# Altium PCB Range_Finder.PcbDoc
Units mm, origin at the board's own origin, x right, y up, seen from the top; angles counter-clockwise.
Board outline 68 x 97 mm, 2 copper layers (Top Layer, Bottom Layer), stack 1.569 mm thick; 50 components, 62 nets, 245 pads, 12 vias.
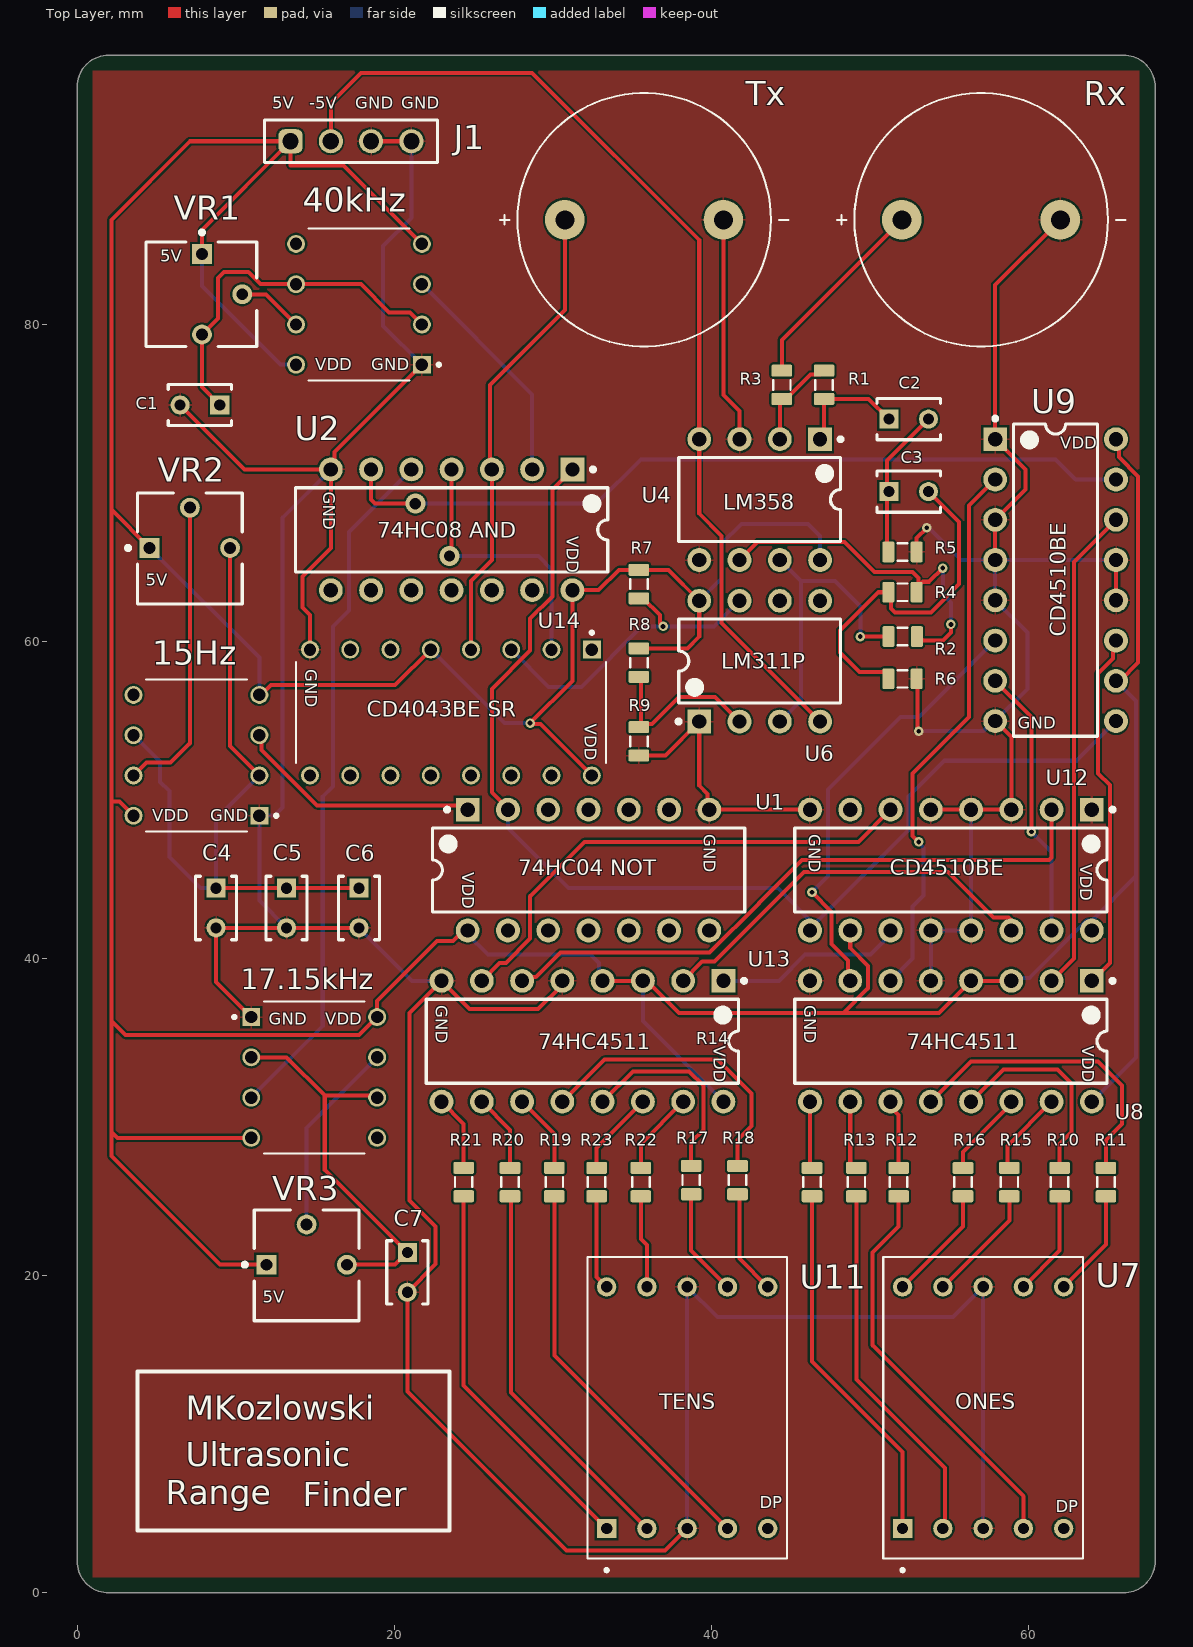
[diagram p0: Top Layer view]
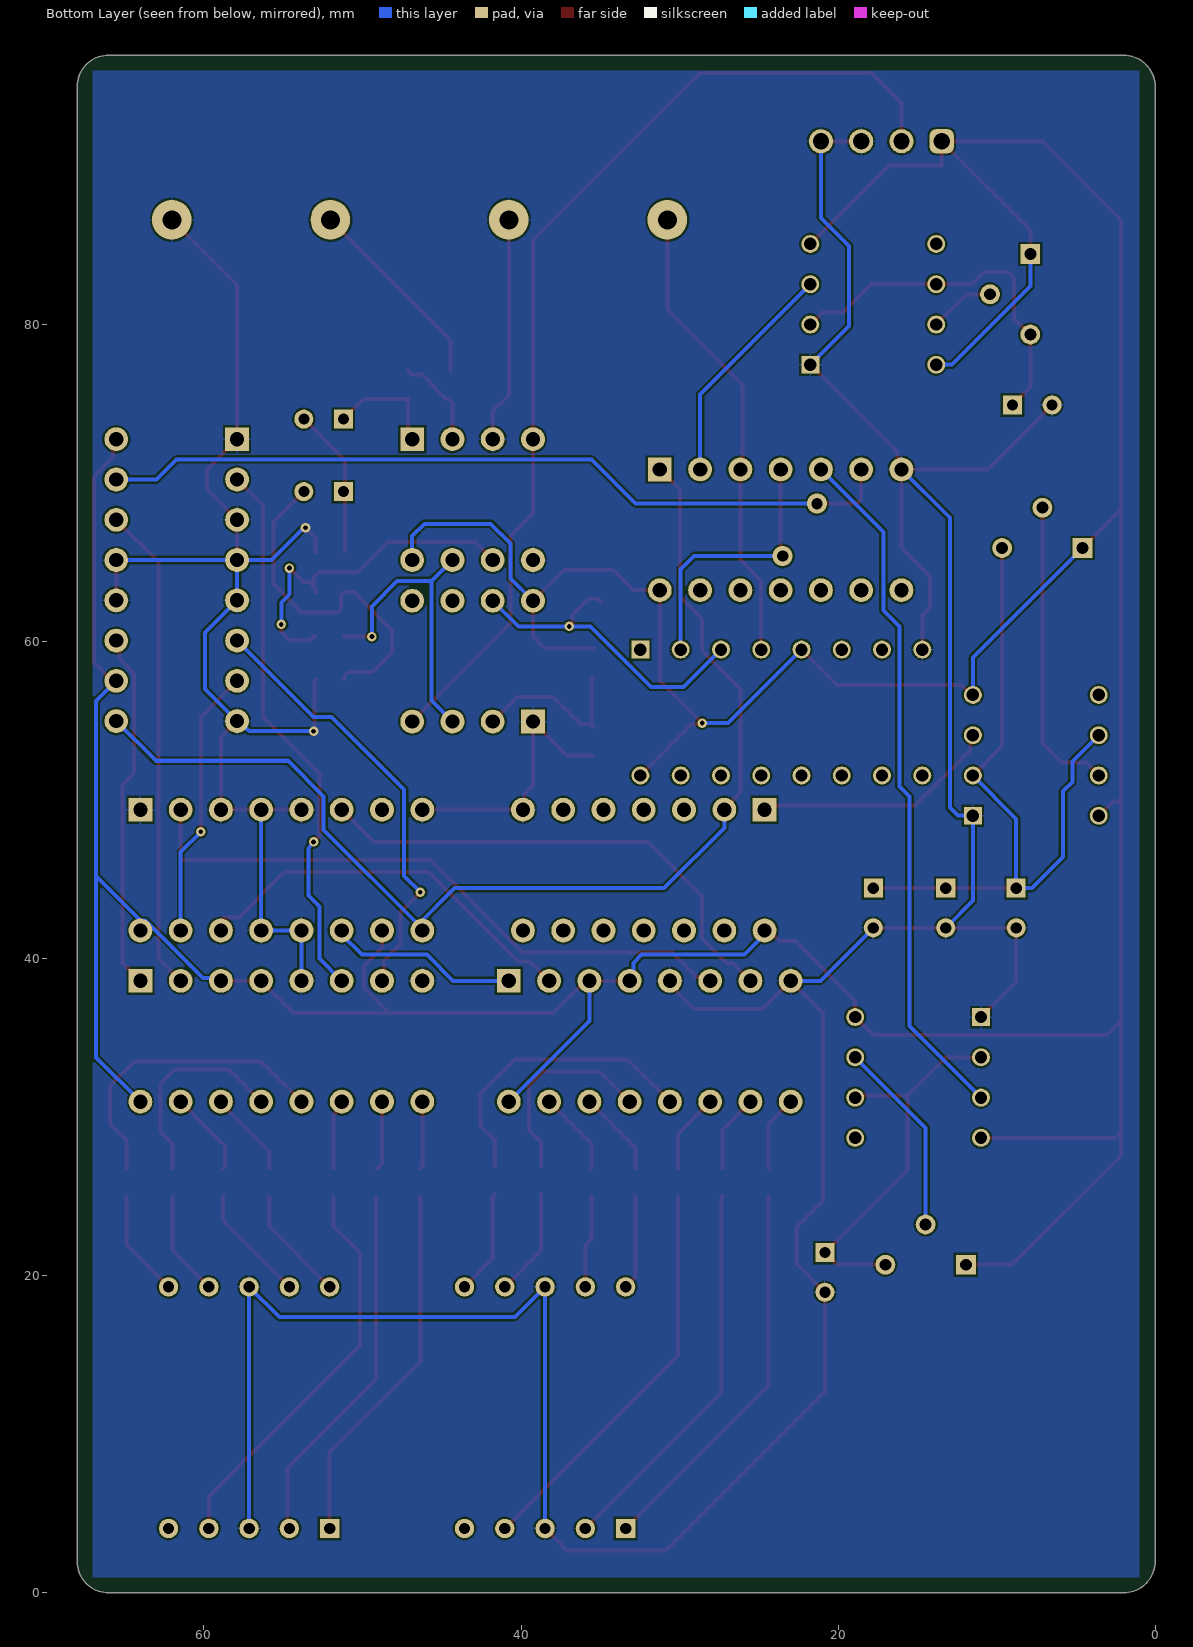
[diagram p1: Bottom Layer view, seen from below]
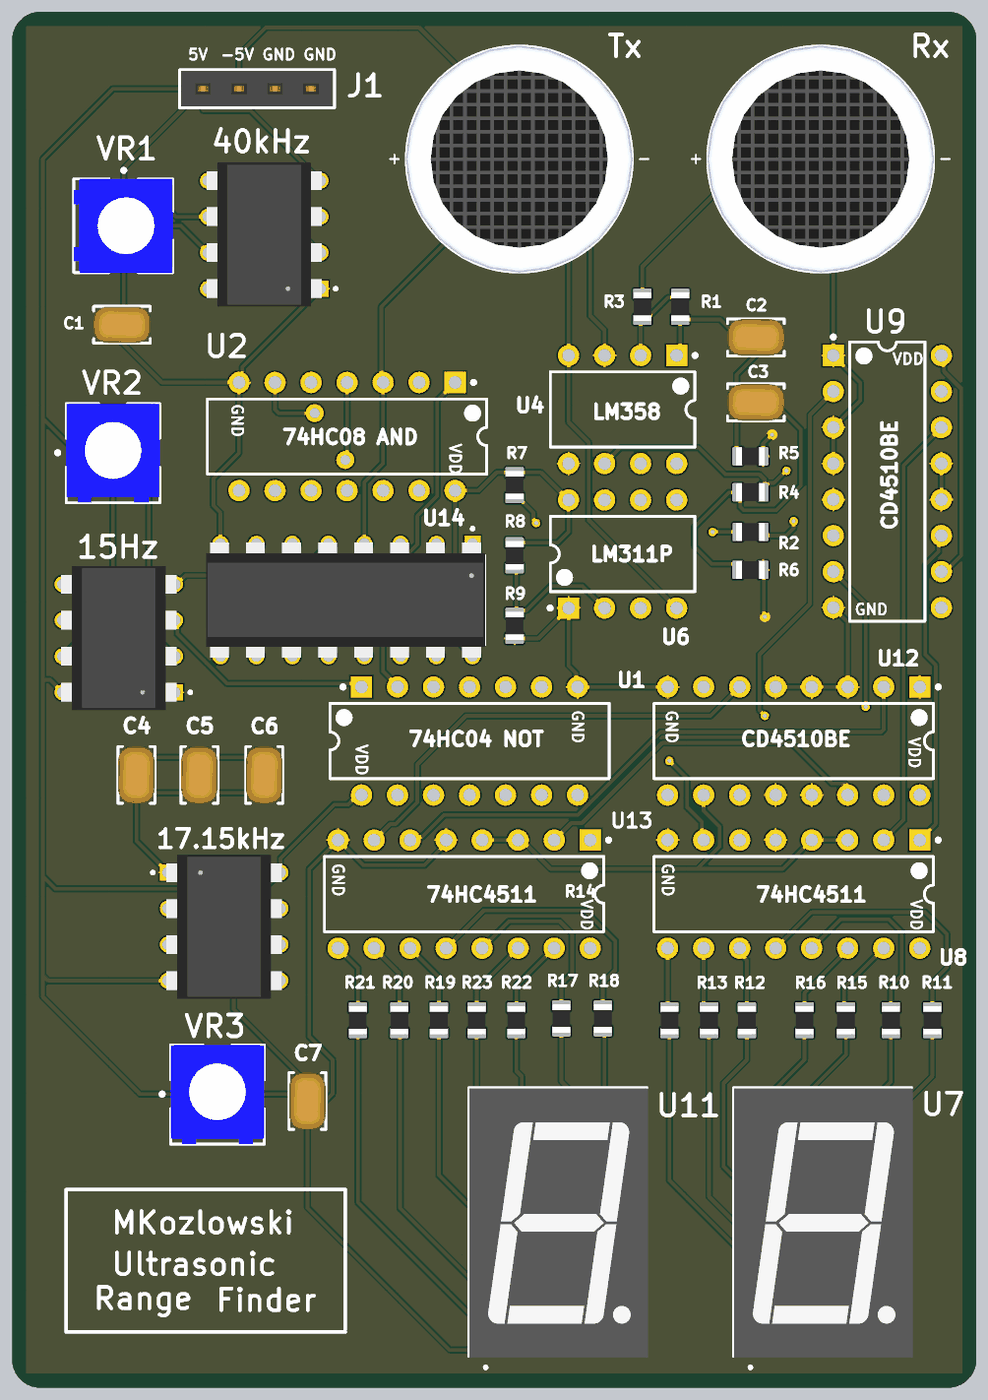
[diagram p2: 3D render of the assembled board from above, using the file's embedded part models]

## Layer stack, top to bottom
Top Solder: solder mask 0.0127, Solder Resist, Dk 3.3
Top Layer: signal copper 0.035
Dielectric 1: core 1.4986, FR-4, Dk 4.3
Bottom Layer: signal copper 0.035
Bottom Solder: solder mask 0.0127, Solder Resist, Dk 3.3

## Board outline
0,2 0,95 cw(c2,95) 2,97 66,97 cw(c66,95) 68,95 68,2 cw(c66,2) 66,0 2,0 cw(c2,2)

## Design rules (kind name [scope] priority, off if disabled: settings)
BoardOutlineClearance [All] p1: gap=0.2 ignorepadtopadclearanceinfootprint=FALSE
Clearance [All] p1: gap=0.127 ignorepadtopadclearanceinfootprint=FALSE except(0.25: Arc-Hole Track-Hole SMDPad-Hole THPad-Hole Via-Hole Fill-Hole Poly-Hole Region-Hole Text-Hole)
ComponentClearance [All] p1: gap=0.127 collisioncheckmode=3 verticalgap=0.127 showdistances=TRUE
DiffPairsRouting [All] p1: maxlimit=0.254 minlimit=0.127 mostfreqgap=0.127 toplayer_minwidth=0.127 toplayer_maxwidth=25.4 toplayer_prefwidth=0.127 bottomlayer_minwidth=0.127 bottomlayer_maxwidth=25.4 bottomlayer_prefwidth=0.127 maxuncoupledlength=12.7
Height [All] p1: minheight=0 maxheight=1816.048 prefheight=12.7
HoleSize [All] p1: absolutevalues=TRUE maxlimit=6.3 minlimit=0.3 maxpercent=80.000 minpercent=20.000
HoleToHoleClearance [All] p1: gap=0.25 allowstackedmicrovias=FALSE
MinimumAnnularRing [All] p1: minimumring=0.076
MinimumSolderMaskSliver [All] p1: minsoldermaskwidth=0
PlaneClearance [All] p1: clearance=0.127
PlaneConnect PlaneConnectPowerPads [InPadClass('PowerPads')] p1: planeconnectstyle=Direct reliefexpansion=0.508 reliefentries=4 reliefconductorwidth=0.254 reliefairgap=0.254
PlaneConnect [All] p2: pad.planeconnectstyle=Relief pad.reliefexpansion=0.3 pad.reliefentries=4 pad.reliefconductorwidth=0.127 pad.reliefairgap=0.127 via.planeconnectstyle=Direct via.reliefexpansion=0.3 via.reliefentries=4 via.reliefconductorwidth=0.127 via.reliefairgap=0.127
PolygonConnect PolygonConnectPowerPads [All vs (InPadClass('PowerPads'))] p1: connectstyle=Direct reliefconductorwidth=0.254 reliefentries=4 polygonreliefangle="90 Angle" airgapwidth=0.254
PolygonConnect [All] p2: thpad.connectstyle=Relief thpad.reliefconductorwidth=0.127 thpad.reliefentries=4 thpad.polygonreliefangle="90 Angle" thpad.airgapwidth=0.127 smdpad.connectstyle=Relief smdpad.reliefconductorwidth=0.127 smdpad.reliefentries=4 smdpad.polygonreliefangle="90 Angle" smdpad.airgapwidth=0.127 via.connectstyle=Direct via.reliefconductorwidth=0.127 via.reliefentries=4 via.polygonreliefangle="90 Angle" via.airgapwidth=0.127
RoutingVias [All] p1: holewidth=0.3 width=0.6 viastyle="Through Hole" minholewidth=0.3 minwidth=0.6 maxholewidth=0.6 maxwidth=6.6
SilkToSilkClearance [All] p1: silktosilkclearance=0
SilkToSolderMaskClearance [IsPad] p1: minsilkscreentomaskgap=0.127 clearancetoexposedcopper=TRUE
SolderMaskExpansion [All] p1: expansion=0.075 istentingtop=FALSE
Width [All] p1: maxlimit=25.4 minlimit=0.127 preferedwidth=0.127 minimp=50.000000 maximp=50.000000 favimp=50.000000
20 further rules are at their usual default settings.

## Classes and differential pairs
component class TOF_Pulse: 15Hz 40kHz C1 C2 C3 C4 C5 C6 J1 R1 R2 R3 R4 R5 R6 R7 R8 R9 Rx Tx U1 U2 U4 U6 U14 VR1 VR2
component class Display: 17.15kHz C7 R10 R11 R12 R13 R14 R15 R16 R17 R18 R19 R20 R21 R22 R23 U7 U9 U11 U12 U13 VR3

## Components (designator, comment, footprint, x,y, rotation, side; value= is the part's Value field where it differs from the comment)
15Hz "TLC555CP" DIP794W45P254L959H508Q8 7.526,52.832 r180 top (schematic designator U5)
17.15kHz "TLC555CP" DIP794W45P254L959H508Q8 14.953,32.512 r0 top (schematic designator U10)
40kHz "TLC555CP" DIP794W45P254L959H508Q8 17.78,81.28 r180 top (schematic designator U3)
C1 "3n3" FP-K221K15X7RF5TL2-MFG 7.747,74.93 r180 top
C2 "520p" FP-K221K15X7RF5TL2-MFG 52.451,74.041 r0 top
C3 "520p" FP-K221K15X7RF5TL2-MFG 52.451,69.469 r0 top
C4 "743n" FP-K221K15X7RF5TL2-MFG 8.763,43.2 r270 top
C5 "45n" FP-K221K15X7RF5TL2-MFG 13.208,43.2 r270 top
C6 "102n" FP-K221K15X7RF5TL2-MFG 17.78,43.2 r270 top
C7 "8n9" FP-K221K15X7RF5TL2-MFG 20.828,20.213 r270 top
J1 "61300411821" 61300411821 17.272,91.567 r0 top
R1 "1KR5J" RESC0805(2012)_L 47.117,76.2 r270 top value=110k
R2 "1KR5J" RESC0805(2012)_L 52.07,60.325 r180 top value=150k
R3 "1KR5J" RESC0805(2012)_L 44.45,76.2 r270 top value=10k
R4 "1KR5J" RESC0805(2012)_L 52.069,63.119 r0 top value=10k
R5 "1KR5J" RESC0805(2012)_L 52.069,65.659 r0 top value=12k
R6 "1KR5J" RESC0805(2012)_L 52.07,57.658 r0 top value=12k
R7 "1KR5J" RESC0805(2012)_L 35.433,63.627 r270 top value=20k
R8 "1KR5J" RESC0805(2012)_L 35.433,58.674 r270 top value=90k
R9 "1KR5J" RESC0805(2012)_L 35.433,53.71 r270 top value=10k
R10 "1KR5J" RESC0805(2012)_L 61.976,25.908 r270 top value=330R
R11 "1KR5J" RESC0805(2012)_L 64.897,25.908 r270 top value=330R
R12 "1KR5J" RESC0805(2012)_L 51.816,25.908 r270 top value=330R
R13 "1KR5J" RESC0805(2012)_L 49.149,25.908 r270 top value=330R
R14 "1KR5J" RESC0805(2012)_L 46.355,25.908 r270 top value=330R
R15 "1KR5J" RESC0805(2012)_L 58.801,25.908 r270 top value=330R
R16 "1KR5J" RESC0805(2012)_L 55.88,25.908 r270 top value=330R
R17 "1KR5J" RESC0805(2012)_L 38.735,26.035 r270 top value=330R
R18 "1KR5J" RESC0805(2012)_L 41.656,26.035 r270 top value=330R
R19 "1KR5J" RESC0805(2012)_L 30.099,25.909 r270 top value=330R
R20 "1KR5J" RESC0805(2012)_L 27.305,25.909 r270 top value=330R
R21 "1KR5J" RESC0805(2012)_L 24.384,25.909 r270 top value=330R
R22 "1KR5J" RESC0805(2012)_L 35.56,25.908 r270 top value=330R
R23 "1KR5J" RESC0805(2012)_L 32.766,25.909 r270 top value=330R
Rx "Rx" XDCR_CUSA-T80-12-2600-TH 57.023,86.614 r0 top value=0 (schematic designator A2)
Tx "Tx" XDCR_CUSA-T80-12-2600-TH 35.767,86.614 r0 top value=0 (schematic designator A1)
U1 "SN74HC04N" N0014A#1 32.258,45.593 r270 top
U2 "SN74HC08N" N0014A#2 23.622,67.056 r270 top
U4 "LM358P" P0008A 43.053,68.961 r270 top
U6 "LM311P" P0008A 43.053,58.772 r90 top
U7 "LDSC512RI" LED_LDSC512RI 57.15,11.684 r90 top
U8 "CD74HC4511E" N0016A 55.118,34.798 r270 top
U9 "CD4510BE" N0016A 61.722,63.881 r0 top
U11 "LDSC512RI" LED_LDSC512RI 38.481,11.684 r90 top
U12 "CD4510BE" N0016A 55.118,45.593 r270 top
U13 "CD74HC4511E" N0016A 31.877,34.798 r270 top
U14 "CD4043BE" DIP794W45P254L1969H508Q16 23.577,55.532 r270 top
VR1 "3362P-1-103LF" BOUR-3362P 7.839,81.915 r270 top
VR2 "3362P-1-103LF" BOUR-3362P 7.112,65.878 r0 top
VR3 "3362P-1-103LF" BOUR-3362P 14.478,20.666 r0 top

## Footprints (in the part's own frame and the unit in brackets; to place one, negate y for a bottom-side part, rotate by r counter-clockwise, add the part's x,y. Pads: shape width x height; smd on the part's side, far side on the other; paste and mask are expansions set on the pad)
61300411821 [mm] "Socket Header, Pitch 2.54 mm, THT, Vertical, single row, 4p"
  rrect50% 1.52x1.52 hole 1.02: 1(-3.81,0)
  round 1.52 hole 1.02: 2(-1.27,0) 3(1.27,0) 4(3.81,0)
  silkscreen extent -5.46,-1.35 5.46,1.35, body extent -5.33,-1.25 5.33,1.25, height 8.55
BOUR-3362P [mm] "THD, 3-Leads, Body 6.6x6.99mm, Pitch 2.54mm"
  rect 1.25x1.25 hole 0.75: 1(-2.54,0.035)
  round 1.25 hole 0.75: 2(0,2.575) 3(2.54,0.035)
  silkscreen extent -4.02,-3.49 3.3,3.5, body extent -3.3,-3.49 3.3,3.5, height 4.5
DIP794W45P254L959H508Q8 [mm]
  rect 1.13x1.13 hole 0.78: 1(-3.97,3.81)
  round 1.13 hole 0.78: 2(-3.97,1.27) 3(-3.97,-1.27) 4(-3.97,-3.81) 5(3.97,-3.81) 6(3.97,-1.27) 7(3.97,1.27) 8(3.97,3.81)
  silkscreen extent -5.13,-4.79 3.18,4.79, body extent -4.06,-5.09 4.06,5.07, height 5.21
DIP794W45P254L1969H508Q16 [mm]
  rect 1.13x1.13 hole 0.78: 1(-3.97,8.89)
  round 1.13 hole 0.78: 2(-3.97,6.35) 3(-3.97,3.81) 4(-3.97,1.27) 5(-3.97,-1.27) 6(-3.97,-3.81) 7(-3.97,-6.35) 8(-3.97,-8.89) 9(3.97,-8.89) 10(3.97,-6.35) 11(3.97,-3.81) 12(3.97,-1.27) 13(3.97,1.27) 14(3.97,3.81) 15(3.97,6.35) 16(3.97,8.89)
  silkscreen extent -5.13,-9.77 3.18,9.77, body extent -4.06,-9.9 4.06,9.78, height 5.21
FP-K221K15X7RF5TL2-MFG [mm]
  rect 1.2x1.2 hole 0.7 paste-1000 mask+0: 1(-1.25,0)
  round 1.2 hole 0.7 paste-1000 mask+0: 2(1.25,0)
  silkscreen extent -2,-1.3 2,1.3, body extent -2.1,-1.4 2.1,1.4, height 0.25
LED_LDSC512RI [mm]
  rect 1.218x1.218 / inner round 1.218 / far side rect 1.218x1.218 hole 0.71: 1(-7.62,5.08)
  round 1.218 hole 0.71: 2(-7.62,2.54) 3(-7.62,0) 4(-7.62,-2.54) 5(-7.62,-5.08) 6(7.62,-5.08) 7(7.62,-2.54) 8(7.62,0) 9(7.62,2.54) 10(7.62,5.08)
  silkscreen extent -10.35,-6.3 9.5,6.3, body extent -9.56,-6.36 9.44,6.24, height 8
N0014A#1 [mm] "DIP, 14-Leads, Body 19.7x6.6mm, Pitch 2.54mm"
  rect 1.5x1.5 hole 0.9: 1(-3.81,-7.62)
  round 1.5 hole 0.9: 2(-3.81,-5.08) 3(-3.81,-2.54) 4(-3.81,0) 5(-3.81,2.54) 6(-3.81,5.08) 7(-3.81,7.62) 8(3.81,7.62) 9(3.81,5.08) 10(3.81,2.54) 11(3.81,0) 12(3.81,-2.54) 13(3.81,-5.08) 14(3.81,-7.62)
  silkscreen extent -3.93,-9.85 2.65,9.85, body extent -3.95,-9.85 3.95,9.85, height 5.08
N0014A#2 [mm] "DIP, 14-Leads, Body 19.7x6.6mm, Pitch 2.54mm"
  rect 1.5x1.5 hole 0.9: 1(-3.81,7.62)
  round 1.5 hole 0.9: 2(-3.81,5.08) 3(-3.81,2.54) 4(-3.81,0) 5(-3.81,-2.54) 6(-3.81,-5.08) 7(-3.81,-7.62) 8(3.81,-7.62) 9(3.81,-5.08) 10(3.81,-2.54) 11(3.81,0) 12(3.81,2.54) 13(3.81,5.08) 14(3.81,7.62)
  silkscreen extent -3.93,-9.85 2.65,9.85, body extent -3.95,-9.85 3.95,9.85, height 5.08
N0016A [mm] "DIP, 16-Leads, Body 19.7x6.6mm, Pitch 2.54mm"
  rect 1.5x1.5 hole 0.9: 1(-3.81,8.89)
  round 1.5 hole 0.9: 2(-3.81,6.35) 3(-3.81,3.81) 4(-3.81,1.27) 5(-3.81,-1.27) 6(-3.81,-3.81) 7(-3.81,-6.35) 8(-3.81,-8.89) 9(3.81,-8.89) 10(3.81,-6.35) 11(3.81,-3.81) 12(3.81,-1.27) 13(3.81,1.27) 14(3.81,3.81) 15(3.81,6.35) 16(3.81,8.89)
  silkscreen extent -3.93,-9.85 2.65,10.32, body extent -3.95,-9.85 3.95,9.85, height 5.08
P0008A [mm] "DIP, 8-Leads, Body 10.15x6.6mm, Pitch 2.54mm"
  rect 1.5x1.5 hole 0.9: 1(-3.81,3.81)
  round 1.5 hole 0.9: 2(-3.81,1.27) 3(-3.81,-1.27) 4(-3.81,-3.81) 5(3.81,-3.81) 6(3.81,-1.27) 7(3.81,1.27) 8(3.81,3.81)
  silkscreen extent -3.93,-5.1 2.65,5.24, body extent -3.95,-5.07 3.95,5.07, height 5.08
RESC0805(2012)_L [mm] "Chip Resistor, Body 2.0x1.3mm, IPC High Density"
  rrect25% 0.76x1.3 smd: 1(-0.9,0) 2(0.89,0)
  silkscreen extent -0.3,-0.55 0.3,0.55, body extent -1,-0.62 1,0.63, height 0.6
XDCR_CUSA-T80-12-2600-TH [mm]
  round 2.5 hole 1.2: N(5,0) P(-5,0)
  silkscreen extent -9.1,-8 9.1,8, body extent -7.99,-8 7.99,8, height 12.3

## Part data
15Hz 17.15kHz 40kHz: library part CMP-007-000000-3, "2.1-MHz, 250-A, Low-Power Timer 8-PDIP 0 to 70", Package="PDIP-8 Texas", Component Type=Standard, Design Item ID=TLC555CP, Digi-Key_Part_Number=TLC555CPW-ND, DigiKey-Purchase-URL=https://snapeda.com/shop?store=DigiKey&id=891867, MF="Texas Instruments", Mouser-Purchase-URL=https://snapeda.com/shop?store=Mouser&id=891867, MP=TLC555CP, Pin Count=8, SnapEDA_Link=https://www.snapeda.com/parts/TLC555CP/Texas%20Instruments/view-part/891867/?ref=snap, Source=TLC555CP.SchLib, Texas_Instruments-Purchase-URL=https://snapeda.com/shop?store=Texas+Instruments&id=891867
C1 C2 C3 C4 C5 C6 C7: library part CMP-00030-39474895-1, "K221K15X7RF5TL2 Multilayer Ceramic Capacitor, 220 pF, 50 V, ± 10%, X7R, Radial Leaded", Capacitance=220pF, Case/Package=Dipped, Dielectric=X7R, Dielectric Material=Ceramic, Max Operating Temperature=125°C, Min Operating Temperature=-55°C, Tolerance=10%, Voltage Rating=50V, Depth=2.6mm, Diameter=500µm, Height=4mm, Height - Seated (Max)=5.588mm, Lead Diameter=500µm, Lead Length=30mm, Lead Pitch=2.5mm, Lead/Base Style=Straight, Length=4mm, Mount="Through Hole", NexarPartId=39474895, Number of Pins=2, Packaging="Cut Tape", Radiation Hardening=No, REACH SVHC=Unknown, RoHS=Compliant, Termination=Radial, Thickness=2.6mm, Voltage Rating (DC)=50V, Weight=160.004709mg, Width=2.4892mm
J1: library part CMP-1502-01316-2, Contact Resistance=20mΩ, Current Rating=3A, Operating Supply Voltage=250V, Gender=Female, Lead Pitch=2.54mm, NexarPartId=61924712, Number of Pins=4, Orientation=Vertical, RoHS=Non-Compliant
R1 R2 R3 R4 R5 R6 R7 R8 R9 R10 R11 R12 R13 R14 R15 R16 R17 R18 R19 R20 R21 R22 R23: library part CMP-009-00076-2, "1K 0.125W 5% 0805 (2012 Metric)  SMD", Case/Package=0805, Power=125mW, Tolerance=5%, Mounting Technology=SMT, Pins=2
Rx Tx: library part CMP-061-000000-1, "ULTRASONIC SENSOR", Package=None, Availability=Unavailable, Component Type=Standard, Design Item ID=CUSA-T80-12-2600-TH, MP=CUSA-T80-12-2600-TH, Pin Count=2, Price=None, Source=CUSA-T80-12-2600-TH.SchLib
U1: library part CMP-1615-00892-2, "Hex Inverters, N0014A, TUBE", F @ Nom Voltage(Max)(Mhz)=20, Generic Part Number=SN74HC04, ICC @ Nom Voltage(Max)(mA)=0.02, Manufacturer="Texas Instruments", Operating Temperature Range(C)="-40 to 85", Rating=Catalog, Voltage(Nom)(V)=5, Bits(#)=6, Code_JEDEC=MS-001, DatasheetVersion=SCLS078F, Input Type=CMOS, Output Drive (IOL/IOH)(Max)(mA)=-4/4, Output Type=CMOS, PackageReference=N0014A, Schmitt Trigger=No, Technology Family=HC, tpd @ Nom Voltage(Max)(ns)=20, VCC(Max)(V)=6, VCC(Min)(V)=2
U2: library part CMP-0777-00250-3, "Quadruple 2-Input Positive-AND Gates, N0014A, TUBE", F @ Nom Voltage(Max)(Mhz)=70, Generic Part Number=SN74HC08, ICC @ Nom Voltage(Max)(mA)=0.02, Manufacturer="Texas Instruments", Operating Temperature Range(C)="-40 to 85", Rating=Catalog, tpd @ Nom Voltage(Max)(ns)=28, Voltage(Nom)(V)=5, Bits(#)=4, DatasheetVersion=SCLS081F, Input Type=CMOS, Output Type=CMOS, PackageReference=N0014A, Schmitt Trigger=No, Technology Family=HC, VCC(Max)(V)=6, VCC(Min)(V)=2
U4: library part CMP-2000-06549-1, "Dual Operational Amplifier, 3 to 32 V, 0 to 70 degC, 8-Pin PDIP (P), RoHS, Tape and Reel", Manufacturer="Technik Industrial", Package Description="8-Pin Double In-line Package, Body 9.59 x 6.35 mm, Pitch 2.54 mm", Package Reference=P8, Datasheet URL=http://www.ti.com/lit/ds/symlink/lm358.pdf, Datasheet Version="Rev. T, 04/2015", Manufacturer URL=http://www.technik.com.hk/, Mounting Technology=ThroughHole, Package URL=http://www.ti.com/lit/ml/mpdi001b/mpdi001b.pdf
U6: library part CMP-1685-00016-1, "Quad Differential Comparator, 3.5 to 30 V, 0 to 70 degC, 8-Pin PDIP (P), Pb-Free (RoHS), Tube", Case Code (Imperial)=0603, Case Code (Metric)=1608, Max Operating Temperature="155 degC", Min Operating Temperature="-55 degC", Package Quantity=5000, Power Rating="100 mW", Resistance="390 Ohm", Tolerance=1%, Voltage Rating="75 V", Case\Package=0603, ComponentLink1Description="Manufacturer URL", ComponentLink1URL=http://www.ti.com/, ComponentLink2Description=Datasheet, ComponentLink2URL=http://www.ti.com/general/docs/lit/getliterature.tsp?genericPartNumber=LM311&fileType=pdf, ComponentLink3Description="Package Specification", ComponentLink3URL=http://www.ti.com/lit/ml/mpdi001b/mpdi001b.pdf, DatasheetVersion="SLCS007I, 06/2015", Height="0.45 mm", Length="1.6 mm", Mount="Surface Mount", PackageDescription="8-Pin Double In-line Package, Body 9.59 x 6.35 mm, Pitch 2.54 mm", PackageReference=P0008A, PackageVersion="4040082/E, 04/2010", Packaging="Tape and Reel", Pins=2, Radiation Hardening=No, REACH SVHC=Unknown, RoHSCompliant=true, Weight="7.1E-05 oz", Width="0.8 mm"
U7 U11: library part CMP-065-000000-2, "DISPLAY, 7 SEGMENT, 14.2MM, GREEN; LED Colour:Green; Forward Current If:10mA; Forward Voltage:2.2V; Luminous Intensity:3.5mcd; No. of Digits / Alpha:1; Character Size:14.2mm; Common Connection:Common Cathode; Product Range:-; SVHC:No SVHC (27-Jun-2018)", Package="DIP-10 Lumex", Component Type=Standard, Design Item ID=LDSC512RI, MF="Lumex Optoelectronics", MP=LDSC512RI, Pin Count=10, SnapEDA_Link=https://www.snapeda.com/parts/LDSC512RI/Lumex/view-part/?ref=snap, Source=LDSC512RI.SchLib
U8 U13: library part CMP-0388-00312-2, "High Speed CMOS Logic BCD-to-7-Segment Latch / Decoder / Driver, 2 to 6 V, -55 to 125 degC, 16-pin DIP (N16), Pb-Free (RoHS)", Manufacturer="Texas Instruments", Rating=Catalog, Code_JEDEC=MS-001, ComponentLink1Description="Manufacturer URL", ComponentLink1URL=http://www.ti.com/, ComponentLink2Description=Datasheet, ComponentLink2URL=http://www.ti.com/general/docs/lit/getliterature.tsp?genericPartNumber=CD74HC4511&fileType=pdf, ComponentLink3Description="Package Specification", ComponentLink3URL=http://www.ti.com/litv/pdf/mpdi002c, DatasheetVersion=SCHS279D, Eco-Plan="Pb-Free (RoHS)", Mounting Technology="Through Hole", PackageDescription="16-Pin Plastic In-Line, Body 19.305 x 6.35 mm, Pitch 2.54 mm", PackageReference=N0016A, PackageVersion=4040049/E, PartNumber=CD74HC4511E, SubFamily="Discrete Segment LED Driver", Vin(Max)(V)=6, Vin(Min)(V)=2
U9 U12: library part CMP-1623-00551-2, "CMOS Presettable BCD Up/Down Counter, N0016A, TUBE", F @ Nom Voltage(Max)(Mhz)=8, Generic Part Number=CD4510B, ICC @ Nom Voltage(Max)(mA)=0.03, Manufacturer="Texas Instruments", Operating Temperature Range(C)="-55 to 125", Rating=Catalog, tpd @ Nom Voltage(Max)(ns)=200, Voltage(Nom)(V)=5,10,15, Bits(#)=4, Code_JEDEC=MS-001, DatasheetVersion=SCHS071B, Function=Counter, Input Type=CMOS, Inputs=1, Output Drive (IOL/IOH)(Max)(mA)=1.5/-1.5, Output Type=CMOS, PackageReference=N0016A, Schmitt Trigger=No, Technology Family=CD4000, Type=Other, VCC(Max)(V)=18, VCC(Min)(V)=3
U14: library part CMP-030-000002-2, "CMOS Quad NOR R/S Latch with 3-State Outputs 16-PDIP -55 to 125", Package="PDIP-16 Texas Instruments", Arrow_Electronics-Purchase-URL=https://snapeda.com/shop?store=Arrow+Electronics&id=577167, Availability=Good, Component Type=Standard, Design Item ID=CD4043BE, DigiKey-Purchase-URL=https://snapeda.com/shop?store=DigiKey&id=577167, MF="Texas Instruments", Mouser-Purchase-URL=https://snapeda.com/shop?store=Mouser&id=577167, MP=CD4043BE, Pin Count=15, Price=None, SnapEDA_Link=https://www.snapeda.com/parts/CD4043BE/Texas%20Instruments/view-part/577167/?ref=snap, Source=CD4043BE.SchLib, Texas_Instruments-Purchase-URL=https://snapeda.com/shop?store=Texas+Instruments&id=577167
VR1 VR2 VR3: library part CMP-009-00039-2, "Square Trimpot(R) Trimming Potentiometer, 10 KOhm, 300 V, -55 to 125 degC, 3-Pin THD, RoHS, Tube", Case/Package=3326P, Manufacturer=Bourns, Max Operating Temperature=125°C, Min Operating Temperature=-55°C, Package Description="3-Pin Through Hole Device, Body 6.6 x 6.99 mm, Pitch 2.54 mm", Package Quantity=250, Power=500mW, Resistance=10k, Tolerance=10%, Voltage Rating=300V, Composition=Potentiometer, Datasheet URL=http://www.bourns.com/docs/Product-Datasheets/3362.pdf, Datasheet Version=May-16, Lead Pitch=2.54mm, Manufacturer URL=http://www.bourns.com/, Mounting Technology=TH, Package Reference=3326P, Packaging=Rail/Tube, Pins=3, RoHS Compliant=True

## Via types
v1: diameter 0.6, hole 0.3, Top Layer to Bottom Layer, 10 vias
v2: diameter 1.27, hole 0.711, Top Layer to Bottom Layer, 2 vias

## Nets (pads, with @x,y where several pads share a name; then routed paths per layer and width w, separated by ;. In a path a pad name is that pad's centre, name@x,y a point inside that pad or via, vN(x,y) a via of type N, cw(c..) or ccw(c..) an arc to the next point about the centre after c; other vN are vias at no path point)
5V: 15Hz.4 15Hz.8 17.15kHz.4 17.15kHz.8 40kHz.4 40kHz.8 J1.1 R7.1 R8.1 U1.14 U2.14 U4.8 U6.8 U8.3 U8.4 U8.16 U9.10 U9.16 U12.10 U12.16 U13.3 U13.4 U13.16 U14.5 U14.16 VR1.1 VR2.1 VR3.1 | length 342
  Top Layer w0.254: 15Hz.8 2.667,49.911 2.159,49.911 ; VR2.1 2.159,68.326 ; VR1.1 7.874,85.979 J1.1 ; 17.15kHz.4 2.54,28.702 2.159,29.083 ; 15Hz.4 11.596,56.642 12.215,57.261 20.066,57.261 U14.5 ; VR3.1 9.017,20.701 2.159,27.559 2.159,29.083 ; 40kHz.4 16.797,90.043 13.462,90.043 J1.1 ; U1.14 24.373,41.783 23.706,41.116 22.701,41.116 18.923,37.338 17.15kHz.8 17.78,35.179 3.048,35.179 2.159,36.068 ; U14.16 29.231,54.798 28.641,54.798 v1(28.575,54.864) 31.242,57.531 U2.14 32.893,63.246 34.174,64.527 R7.1 37.298,64.527 U6.8 39.243,60.325 38.492,59.574 R8.1 ; U13.4 U13.3 35.941,38.608 37.973,36.576 48.335,36.576 ; U12.10 48.768,40.676 49.899,39.545 49.899,38.14 48.335,36.576 ; U8.3 U8.4 54.356,36.576 48.335,36.576 ; U9.10 65.786,57.531 66.929,58.674 66.929,70.433 65.722,71.64 65.722,72.581 U9.16 ; 2.159,29.083 2.159,36.068 ; 2.159,36.068 2.159,49.911 ; 2.159,49.911 2.159,68.326 ; 2.159,68.326 2.159,86.614 7.112,91.567 J1.1
  Bottom Layer w0.254: VR2.1 11.496,58.989 15Hz.4 ; VR1.1 7.874,82.423 12.827,77.47 40kHz.8 ; U14.5 26.945,54.864 v1(28.575,54.864) ; U1.14@24.421,42.074 24.638,41.857 24.638,41.529 25.908,40.259 32.385,40.259 32.909,39.735 32.909,38.846 U13.4 ; U13.3 35.687,36.068 U13.16 ; U6.8 40.652,63.991 40.652,66.179 41.91,67.437 46.101,67.437 46.863,66.675 U4.8 ; U8.3 59.118,38.798 60.059,38.798 63.679,42.418 64.008,42.418 66.802,45.212 ; U8.16 66.802,33.782 66.802,45.212 ; U9.10 66.802,56.261 66.802,45.212
15Hz: 15Hz.3 U1.1 | length 15.6
  Top Layer w0.254: 15Hz.3 11.642,53.956 11.642,53.156 15.141,49.657 24.384,49.657 U1.1
17.15kHz: 17.15kHz.3 U2.5 | length 43.8
  Bottom Layer w0.254: 17.15kHz.3 15.494,35.753 15.494,50.228 16.129,50.863 16.129,60.967 17.145,61.983 17.145,66.929 U2.5
40kHz: 40kHz.3 U2.2 | length 14.6
  Bottom Layer w0.254: 40kHz.3 28.702,75.598 U2.2
-5V: J1.2 U4.4 U6.4 | length 64.3
  Top Layer w0.254: J1.2 16.002,93.98 17.907,95.885 28.702,95.885 39.243,85.344 U4.4 39.243,68.072 40.652,66.663 40.652,61.173 U6.4
Cout: U9.7 U12.15 | length 16.6
  Top Layer w0.254: U9.7 60.198,55.245 v1(60.198,48.006)
  Bottom Layer w0.254: v1(60.198,48.006) 61.468,46.736 U12.15@61.468,42.418
DISCH_15: 15Hz.7 VR2.2 | length 19.3
  Top Layer w0.254: 15Hz.7 4.367,52.373 5.891,52.373 7.112,53.594 VR2.2
DISCH_17: 17.15kHz.7 VR3.2 | length 12.4
  Bottom Layer w0.254: VR3.2 14.478,29.337 17.15kHz.7
DISCH_40: 40kHz.7 VR1.2 | length 4.2
  Top Layer w0.254: VR1.2 11.905,81.915 40kHz.7
GND: 15Hz.1 17.15kHz.1 40kHz.1 C1.2 C4.2 C5.2 C6.2 C7.2 J1.3 J1.4 R5.2 R6.2 R9.2 Rx.N Tx.N U1.7 U2.7 U4.3 U4.5 U6.1 U7.3 U7.8 U8.5 U8.8 U9.1 U9.3 U9.4 U9.5 U9.8 U9.12 U9.13 U11.3 U11.8 U12.1 U12.3 U12.4 U12.5 U12.8 U12.12 U12.13 U13.5 U13.8 U14.8 | length 333.9
  Top Layer w0.254: C1.2 10.561,70.866 U2.7 ; 17.15kHz.1 8.763,38.542 C4.2 C5.2 C6.2 ; U14.8 14.687,61.684 14.202,62.169 14.202,64.113 16.002,65.913 U2.7 ; J1.3 J1.4 ; 40kHz.1 16.24,71.96 16.24,71.104 U2.7 ; U13.5 30.607,38.354 29.083,36.83 24.765,36.83 U13.8 20.955,36.576 20.955,24.765 22.606,23.114 22.606,20.741 C7.2 20.828,12.7 30.861,2.667 37.084,2.667 U11.3 ; R9.2 37.101,52.82 U6.1 39.243,50.915 39.773,50.385 39.773,49.873 39.878,49.768 U1.7 ; U1.7@39.624,49.657 U1.7@39.735,49.768 ; U1.7@39.64,49.768 39.64,49.641 U1.7 ; Tx.N 40.767,75.565 41.783,74.549 U4.3 ; U12.8 U1.7 ; R5.2 52.959,66.548 v1(53.594,67.183) ; R6.2 53.023,57.595 53.023,54.419 v1(53.086,54.356) ; U12.5@53.887,49.403 U12.4 U12.3 58.928,53.975 U9.8 ; U9.4 U9.3 59.817,69.596 59.817,70.866 U9.1 57.912,82.503 Rx.N ; U9.12 U9.13
  Bottom Layer w0.254: C5.2 11.496,43.662 15Hz.1 12.442,49.022 12.954,49.534 12.954,67.818 U2.7 ; C6.2 21.122,38.608 U13.8 ; J1.4 21.082,86.741 19.304,84.963 19.304,79.916 40kHz.1 ; U11.3 U11.8 40.386,17.399 55.245,17.399 U7.8 U7.3 ; v1(53.086,54.356) 57.158,54.356 57.793,54.991 U9.8 59.944,57.023 59.944,60.579 U9.5 U9.4 ; v1(53.594,67.183) 53.721,67.183 55.753,65.151 U9.4 ; U8.5 U12.12 U12.13 U12.4 ; U9.13 U9.4
NetC2_1: C2.1 R1.2 U4.1 | length 7.3
  Top Layer w0.254: U4.1 47.117,73.025 R1.2 49.932,75.31 C2.1
NetC2_2: C2.2 C3.1 R5.1 | length 9.5
  Top Layer w0.254: C3.1@51.094,69.469 51.094,65.734 R5.1 ; C3.1 51.094,69.576 51.094,71.434 C2.2
NetC3_2: C3.2 R4.1 R6.1 | length 22.1
  Top Layer w0.254: R6.1 51.17,57.833 50.917,58.086 49.356,58.086 48.133,59.309 48.133,60.706 50.546,63.119 R4.1 51.345,62.943 51.345,62.088 51.584,61.849 53.848,61.849 55.626,63.627 55.626,67.544 C3.2
NetR1_1: R1.1 R3.2 U4.2 | length 5.9
  Top Layer w0.254: U4.2 44.323,75.057 44.576,75.31 44.72,75.31 46.257,76.847 46.864,76.847 R1.1
NetR2_1: R2.1 R4.2 U4.6 | length 22.5
  Top Layer w0.254: U4.6 42.914,66.282 48.399,66.282 50.292,64.389 52.705,64.389 53.086,64.008 R4.2@53.086,63.389 ; R4.2 52.959,63.389 53.351,63.781 53.748,63.781 v1(54.61,64.643) ; R2.1 52.971,60.324 53.097,60.324 53.35,60.071 54.61,60.071 55.118,60.579 v1(55.118,61.087)
  Bottom Layer w0.254: v1(54.61,64.643) 54.61,62.992 55.118,62.484 v1(55.118,61.087)
NetR2_2: R2.2 U4.7 U6.3 | length 19.4
  Top Layer w0.254: v1(49.403,60.325) R2.2
  Bottom Layer w0.254: U6.3 45.649,56.288 45.649,63.825 ; U4.7 45.649,63.825 ; v1(49.403,60.325) 49.403,62.23 47.808,63.825 45.649,63.825
NetR7_2: R7.2 U6.7 U14.3 | length 20.8
  Top Layer w0.254: R7.2@34.93,62.484 35.183,62.737 35.703,62.737 36.763,61.677 36.763,61.154 v1(36.957,60.96)
  Bottom Layer w0.254: U14.3 29.739,57.15 31.803,57.15 35.613,60.96 v1(36.957,60.96) 40.161,60.96 U6.7
NetR8_2: R8.2 R9.1 U6.2 | length 11.1
  Top Layer w0.254: R8.2 35.561,57.656 35.561,54.738 R9.1 35.618,54.795 36.253,54.795 37.973,56.515 40.23,56.515 U6.2
NetR10_1: R10.1 U8.13 | length 13.2
  Top Layer w0.254: U8.13 58.42,33.02 61.849,33.02 62.738,32.131 62.738,29.083 61.976,28.321 R10.1
NetR10_2: R10.2 U7.7 | length 6.7
  Top Layer w0.254: U7.7 61.976,21.59 R10.2
NetR11_1: R11.1 U8.12 | length 19.4
  Top Layer w0.254: U8.12 56.388,33.528 64.389,33.528 65.913,32.004 65.913,29.591 64.897,28.575 R11.1
NetR11_2: R11.2 U7.6 | length 6.8
  Top Layer w0.254: U7.6 64.897,21.971 R11.2
NetR12_1: R12.1 U8.11 | length 4.4
  Top Layer w0.254: U8.11 51.308,30.651 51.816,30.143 R12.1
NetR12_2: R12.2 U7.4 | length 25.6
  Top Layer w0.254: R12.2 51.816,23.114 50.165,21.463 50.165,15.621 59.69,6.096 U7.4
NetR13_1: R13.1 U8.10 | length 4.4
  Top Layer w0.254: U8.10 48.768,27.061 49.021,26.808 R13.1
NetR13_2: R13.2 U7.2 | length 23.3
  Top Layer w0.254: R13.2 49.149,13.462 54.737,7.874 54.737,4.191 U7.2
NetR14_1: R14.1 U8.9 | length 4.2
  Top Layer w0.254: U8.9 46.228,26.935 R14.1
NetR14_2: R14.2 U7.1 | length 23.3
  Top Layer w0.254: R14.2 46.355,14.605 52.07,8.89 U7.1
NetR15_1: R15.1 U8.15 | length 5.4
  Top Layer w0.254: R15.1 58.674,26.935 58.674,28.194 U8.15
NetR15_2: R15.2 U7.9 | length 7.4
  Top Layer w0.254: U7.9 58.801,23.495 R15.2
NetR16_1: R16.1 U8.14 | length 5.4
  Top Layer w0.254: R16.1 55.88,27.813 58.928,30.861 U8.14
NetR16_2: R16.2 U7.10 | length 7.3
  Top Layer w0.254: U7.10 55.88,23.114 R16.2
NetR17_1: R17.1 U13.13 | length 12.9
  Top Layer w0.254: U13.13 35.052,32.893 38.608,32.893 39.497,32.004 39.497,29.21 38.735,28.448 R17.1
NetR17_2: R17.2 U11.7 | length 6.8
  Top Layer w0.254: R17.2 38.735,21.59 U11.7
NetR18_1: R18.1 U13.12 | length 18.9
  Top Layer w0.254: U13.12 33.274,33.655 40.386,33.655 42.545,31.496 42.545,29.464 41.656,28.575 R18.1
NetR18_2: R18.2 U11.6 | length 6.6
  Top Layer w0.254: R18.2 41.783,25.018 41.783,21.082 U11.6
NetR19_1: R19.1 U13.11 | length 5
  Top Layer w0.254: U13.11 30.099,28.956 R19.1
NetR19_2: R19.2 U11.4 | length 25.5
  Top Layer w0.254: R19.2 30.099,14.986 U11.4
NetR20_1: R20.1 U13.10 | length 4.9
  Top Layer w0.254: U13.10 27.305,29.21 R20.1
NetR20_2: R20.2 U11.2 | length 24.5
  Top Layer w0.254: R20.2 27.359,24.965 27.359,12.646 U11.2
NetR21_1: R21.1 U13.9 | length 4.8
  Top Layer w0.254: U13.9 24.384,29.591 R21.1
NetR21_2: R21.2 U11.1 | length 24.7
  Top Layer w0.254: R21.2 24.384,13.081 U11.1
NetR22_1: R22.1 U13.15 | length 5.3
  Top Layer w0.254: R22.1 35.56,28.321 U13.15
NetR22_2: R22.2 U11.9 | length 5.9
  Top Layer w0.254: R22.2 35.56,22.336 35.941,21.955 U11.9
NetR23_1: R23.1 U13.14 | length 5.4
  Top Layer w0.254: R23.1 32.766,28.067 U13.14
NetR23_2: R23.2 U11.10 | length 6
  Top Layer w0.254: R23.2 32.766,19.939 U11.10
NetU2_4: U2.4 U14.2 | length 17.4
  Top Layer w0.254: v2(23.495,65.405) 23.622,65.532 U2.4
  Bottom Layer w0.254: v2(23.495,65.405) 29.091,65.405 29.927,64.569 U14.2
NetU2_6: U2.6 U9.15 | length 50.7
  Top Layer w0.254: U2.6 18.542,68.961 18.796,68.707 v2(21.336,68.707)
  Bottom Layer w0.254: v2(21.336,68.707) 32.766,68.707 35.56,71.501 61.722,71.501 62.992,70.231 U9.15
NetU8_1: U8.1 U9.11 | length 22.7
  Top Layer w0.254: U8.1 65.139,39.739 65.139,50.946 64.401,51.684 64.401,57.999 65.342,58.94 65.342,59.881 U9.11
NetU8_2: U8.2 U9.14 | length 30.8
  Top Layer w0.254: U8.2 62.877,40.017 62.877,65.036 U9.14
NetU8_6: U8.6 U9.2 | length 35.3
  Top Layer w0.254: v1(53.086,47.371) 52.705,47.752 52.705,51.689 56.261,55.245 56.261,68.58 U9.2
  Bottom Layer w0.254: U8.6@51.652,38.533 51.551,38.533 U8.6 52.705,40.005 52.705,43.307 53.399,44.001 53.399,46.966 v1(53.086,47.371)
NetU8_7: U8.7 U9.6 | length 27.9
  Top Layer w0.254: v1(46.355,44.196) 47.595,42.956 47.595,40.924 48.641,39.878 48.641,38.735 U8.7
  Bottom Layer w0.254: v1(46.355,44.196) 47.371,45.212 47.371,50.673 51.951,55.253 53.094,55.253 U9.6
NetU12_2: U12.2 U13.6 | length 40.3
  Top Layer w0.254: U13.6 28.295,38.836 28.93,38.836 30.48,40.386 39.901,40.386 43.007,43.492 43.007,43.515 45.72,46.228 61.319,46.228 61.468,46.377 U12.2@61.468,50.038
NetU12_6: U12.6 U13.7 | length 32.3
  Top Layer w0.254: U13.7 26.658,39.739 27.039,39.739 28.575,41.275 28.575,43.942 32.004,47.371 49.276,47.371 U12.6 ; U12.6@50.99,49.721 U12.6@51.308,50.038
NetU12_11: U12.11 U13.1 | length 12
  Bottom Layer w0.254: U13.1 44.275,38.608 45.926,40.259 50.038,40.259 51.308,41.529 U12.11
NetU12_14: U12.14 U13.2 | length 24.8
  Top Layer w0.254: U13.2 39.432,39.813 40.194,39.813 45.847,45.466 54.939,45.466 57.797,42.608 58.738,42.608 U12.14@58.928,42.418
Refresh: U1.2 U2.1 U9.9 U12.9 | length 72.6
  Top Layer w0.254: U1.2 27.178,49.486 26.162,50.502 26.162,57.023 28.575,59.436 28.575,61.468 29.972,62.865 29.972,69.596 U2.1
  Bottom Layer w0.254: U1.2 27.178,48.26 30.988,44.45 44.196,44.45 46.482,42.164 52.451,48.133 52.451,50.24 54.701,52.491 63.032,52.491 U9.9
Rx: R3.1 Rx.P | length 12.7
  Top Layer w0.254: R3.1 44.45,79.041 Rx.P
TRIG_15: 15Hz.2 15Hz.6 C4.1 C5.1 C6.1 VR2.3 | length 44.8
  Top Layer w0.254: C4.1 C5.1 C6.1 ; VR2.3 9.652,53.406 15Hz.2
  Bottom Layer w0.254: 15Hz.6 5.224,52.434 5.224,51.164 5.816,50.572 5.816,46.416 7.782,44.45 C4.1 8.763,48.829 15Hz.2
TRIG_17: 17.15kHz.2 17.15kHz.6 C7.1 VR3.3 | length 25.2
  Top Layer w0.254: 17.15kHz.2 13.208,33.782 15.621,31.369 ; VR3.3 20.066,20.701 C7.1 15.621,26.67 15.621,31.369 ; 17.15kHz.6 18.796,31.369 15.621,31.369
TRIG_40: 40kHz.2 40kHz.6 C1.1 VR1.3 | length 23.3
  Top Layer w0.254: C1.1 7.874,76.053 VR1.3 8.89,80.391 8.89,82.931 9.271,83.312 10.795,83.312 11.557,82.55 40kHz.6 17.907,82.55 19.685,80.772 20.988,80.772 40kHz.2
Tx_Pulse: Tx.P U2.3 U14.4 | length 29.7
  Top Layer w0.254: U14.4 24.847,63.836 26.162,65.151 U2.3 26.035,70.993 26.035,76.2 30.767,80.932 Tx.P
pads on no net: 15Hz.5 17.15kHz.5 40kHz.5 U1.3 U1.4 U1.5 U1.6 U1.8 U1.9 U1.10 U1.11 U1.12 U1.13 U2.8 U2.9 U2.10 U2.11 U2.12 U2.13 U6.5 U6.6 U7.5 U11.5 U12.7 U14.1 U14.6 U14.7 U14.9 U14.10 U14.11 U14.12 U14.13 U14.14 U14.15

## Polygon pours and split planes (outlines as drawn)
GND on Top Layer "GND_L01_P000" (solid, remove dead copper, pour order 0): 1,96 1,1 67,1 67,96
GND on Bottom Layer "GND_L02_P001" (solid, remove dead copper, pour order 1): 1,96 1,1 67,1 67,96

## Silkscreen, mask and mechanical layers (free items; w line width, h text height)
Top Overlay:
  lines w0.254: 3.81,3.937 3.81,13.97 23.495,13.97 23.495,3.937 3.81,3.937
  text "-5V" at 14.63,93.624 h0.76
  text "GND" at 17.551,93.624 h0.76
  text "5V" at 5.232,83.972 h0.76
  text "VDD" at 15.011,77.114 h0.76
  text "GND" at 18.567,77.114 h0.76
  text "VDD" at 62.001,72.161 h0.76
  text "GND" at 15.519,69.444 h0.76 r270
  text "LM358" at 40.767,68.326 h1
  text "VDD" at 30.886,66.65 h0.76 r270
  text "74HC08 AND" at 18.923,66.548 h1
  text "5V" at 4.343,63.525 h0.76
  text "CD4510BE" at 62.357,60.325 h1 r90
  text "LM311P" at 40.64,58.293 h1
  text "GND" at 14.376,58.268 h0.76 r270
  text "CD4043BE SR" at 18.254,55.254 h1
  text "VDD" at 32.029,54.839 h0.76 r270
  text "GND" at 59.334,54.508 h0.76
  text "VDD" at 4.724,48.666 h0.76
  text "GND" at 8.407,48.666 h0.76
  text "GND" at 39.522,47.854 h0.76 r270
  text "GND" at 46.152,47.848 h0.76 r270
  text "VDD" at 63.271,45.949 h0.76 r270
  text "VDD" at 24.282,45.441 h0.76 r270
  text "74HC04 NOT" at 27.813,45.254 h1
  text "CD4510BE" at 51.254,45.254 h1
  text "GND" at 22.631,37.059 h0.76 r270
  text "GND" at 45.872,37.059 h0.76 r270
  text "GND" at 12.09,35.839 h0.76
  text "VDD" at 15.646,35.839 h0.76
  text "VDD" at 40.157,34.519 h0.76 r270
  text "VDD" at 63.398,34.519 h0.76 r270
  text "74HC4511" at 29.083,34.29 h1
  text "74HC4511" at 52.324,34.29 h1
  text "5V" at 11.709,18.313 h0.76
  text "TENS" at 36.728,11.582 h1
  text "ONES" at 55.397,11.582 h1
  text "MKozlowski" at 6.858,10.922 h1.52
  text "Ultrasonic" at 6.858,8.001 h1.52
  text "Range" at 5.588,5.588 h1.52
  text "Finder" at 14.224,5.461 h1.52
  text "DP" at 43.053,5.334 h0.76
  text "DP" at 61.722,5.08 h0.76
Mechanical 1:
  the board outline again, w0.254

## Text inside footprints (layer, text, board x,y; h text height)
J1: Top Overlay "GND" at 20.447,93.624 h0.76; Top Overlay "5V" at 12.319,93.626 h0.76